# Altium PCB SiPM_Smart_Probe.PcbDoc
Units mm, origin at the board's own origin, x right, y up, seen from the top; angles counter-clockwise.
Board outline 35 x 46.5 mm, 2 copper layers (Top Layer, Bottom Layer); 15 components, 9 nets, 46 pads, 18 vias.
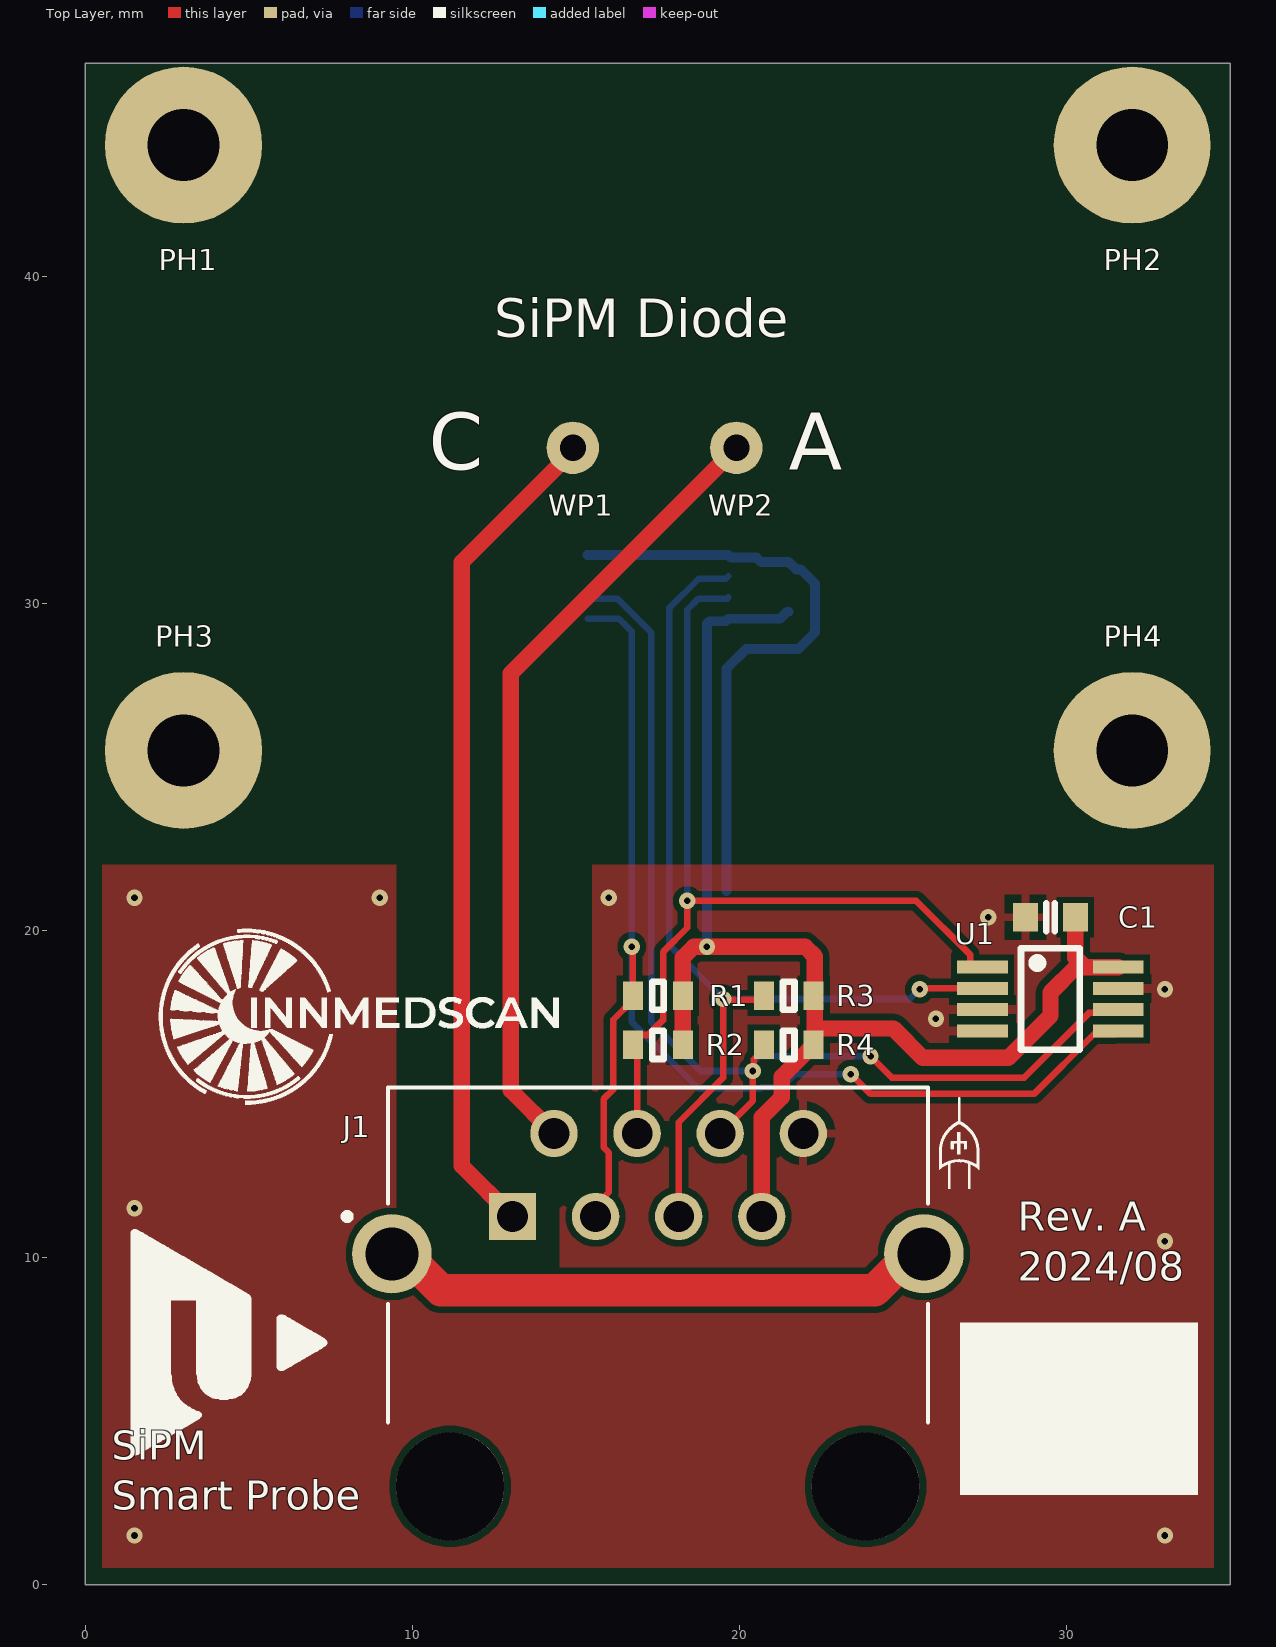
[diagram p0: Top Layer view]
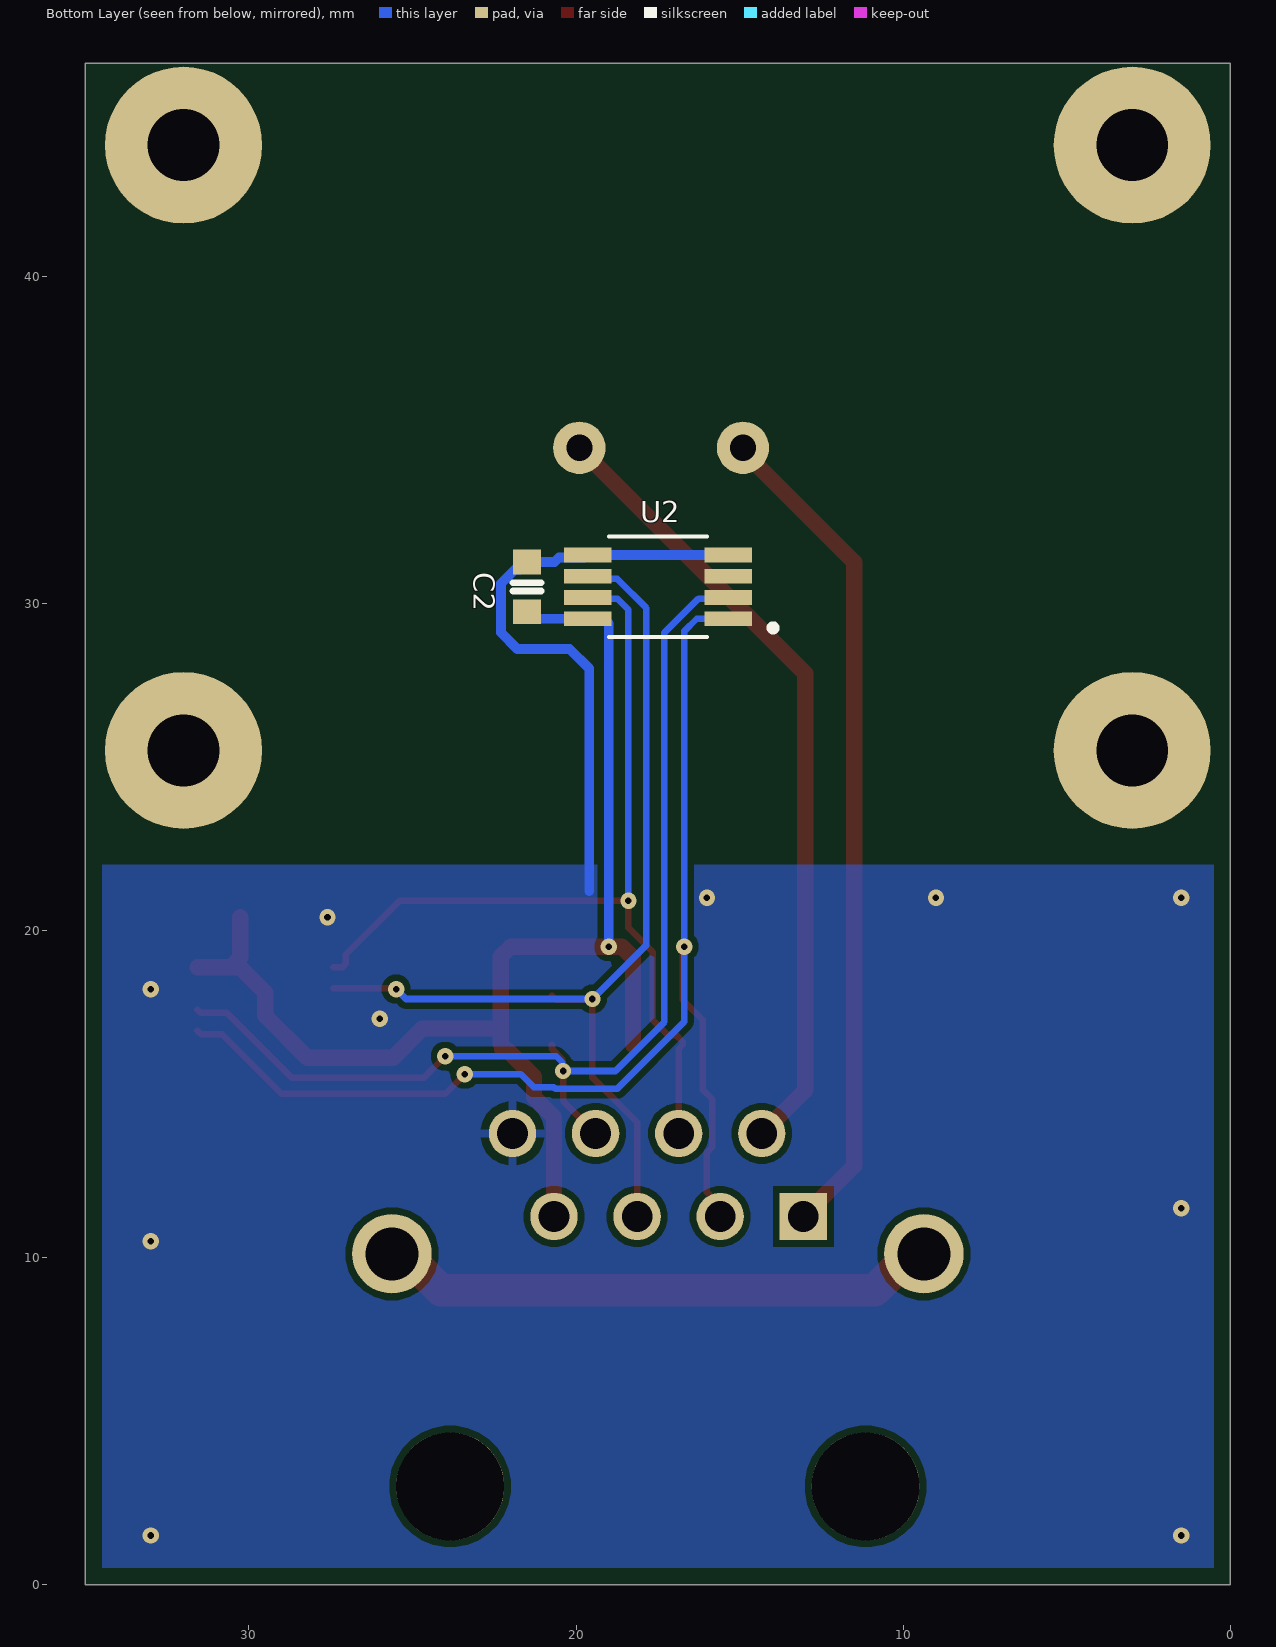
[diagram p1: Bottom Layer view, seen from below]

## Layer stack, top to bottom
Top Solder: solder mask 0.0102, Solder Resist, Dk 3.5
Top Layer: signal copper 0.0356
Dielectric 1: dielectric 0.32, FR-4, Dk 4.8
Bottom Layer: signal copper 0.0356
Bottom Solder: solder mask 0.0102, Solder Resist, Dk 3.5

## Board outline
0,0 0,46.5 35,46.5 35,0

## Design rules (kind name [scope] priority, off if disabled: settings)
BoardOutlineClearance [All] p1: gap=0.5 ignorepadtopadclearanceinfootprint=FALSE
Clearance Diff-to-polygon [InAnyDifferentialPair and (not IsVia) vs InPolygon and (OnLayer('Top Layer') OR OnLayer('Bottom Layer'))] p1: gap=0.8 ignorepadtopadclearanceinfootprint=FALSE
Clearance HV [InNetClass('HV') vs InPolygon] p2: gap=1 ignorepadtopadclearanceinfootprint=FALSE
Clearance Clearance_ALL [All] p3: gap=0.2 ignorepadtopadclearanceinfootprint=FALSE
ComponentClearance [All] p1: gap=0.1 collisioncheckmode=3 verticalgap=0.1 showdistances=FALSE
DiffPairsRouting [All] p1: maxlimit=0.2 minlimit=0.2 mostfreqgap=0.2 toplayer_minwidth=0.2 toplayer_maxwidth=0.2 toplayer_prefwidth=0.2 bottomlayer_minwidth=0.2 bottomlayer_maxwidth=0.2 bottomlayer_prefwidth=0.2 maxuncoupledlength=12.7
HoleSize [All] p1: absolutevalues=TRUE maxlimit=5 minlimit=0.025 maxpercent=80.000 minpercent=20.000
MinimumSolderMaskSliver [All] p1: minsoldermaskwidth=0.05
PolygonConnect [All] p1: thpad.connectstyle=Relief thpad.reliefconductorwidth=0.254 thpad.reliefentries=4 thpad.polygonreliefangle="90 Angle" thpad.airgapwidth=0.254 smdpad.connectstyle=Relief smdpad.reliefconductorwidth=0.254 smdpad.reliefentries=4 smdpad.polygonreliefangle="90 Angle" smdpad.airgapwidth=0.254 via.connectstyle=Direct via.reliefconductorwidth=0.254 via.reliefentries=4 via.polygonreliefangle="90 Angle" via.airgapwidth=0.254
RoutingVias [All] p1: holewidth=0.3 width=0.7 viastyle="Through Hole" minholewidth=0.2 minwidth=0.5 maxholewidth=0.5 maxwidth=1 useviatemplates=TRUE viatemplateguid#1={D885390B-54E5-40C9-AA4A-5F40DA9D8DF2} viatemplatename#1=v50h20m30
SilkToSilkClearance [All] p1: silktosilkclearance=0.1
SilkToSolderMaskClearance [IsPad] p1: minsilkscreentomaskgap=0.1 clearancetoexposedcopper=TRUE
SolderMaskExpansion [All] p1: expansion=0.102 istentingtop=FALSE
SupplyNets "Schematic Supply Nets_2" [InNet('GND')] p1: voltage=0.000
SupplyNets "Schematic Supply Nets_1" [InNet('GND-A')] p2: voltage=0.000
SupplyNets "Schematic Supply Nets" [InNet('+3V3')] p3: voltage=0.000
Width [All] p1: maxlimit=1 minlimit=0.2 preferedwidth=0.254
24 further rules are at their usual default settings.

## Components (designator, comment, footprint, x,y, rotation, side; value= is the part's Value field where it differs from the comment)
C1 "100nF/50V/X7R" sm_cap_0603 29.5,20.4 r0 top
C2 "100nF/50V/X7R" sm_cap_0603 21.5,30.5 r270 bottom
J1 "1-port, RJ-45, No LED" RJ45_1_PORT_NOLED 17.5,3 r0 top
PH1 "2.2 mm hole" c480h220#1 4,39 r0 top
PH2 "2.2 mm hole" c480h220#2 31,39 r0 top
PH3 "2.2 mm hole" c480h220#3 4,21 r0 top
PH4 "2.2 mm hole" c480h220#4 32,23 r0 top
R1 "10k/1%" sm_res_0603 17.5,18 r0 top
R2 "10k/1%" sm_res_0603 17.5,16.5 r0 top
R3 "10k/1%" sm_res_0603 21.5,18 r0 top
R4 "10k/1%" sm_res_0603 21.5,16.5 r0 top
U1 "24LC014H-I/MS" MSOP-8 29.5,17.9 r0 top
U2 "TMP275AIDGKR" VSSOP-8 17.5,30.5 r0 bottom
WP1 "Wirepad, 0.8 mm" Wirepad_0.8MM#1 13.4,35 r0 top
WP2 "Wirepad, 0.8 mm" Wirepad_0.8MM#2 20.4,35 r90 top

## Footprints (in the part's own frame and the unit in brackets; to place one, negate y for a bottom-side part, rotate by r counter-clockwise, add the part's x,y. Pads: shape width x height; smd on the part's side, far side on the other; paste and mask are expansions set on the pad)
c480h220#1 [mm]
  round 4.8 hole 2.2: 1(-1,5)
c480h220#2 [mm]
  round 4.8 hole 2.2: 1(1,5)
c480h220#3 [mm]
  round 4.8 hole 2.2: 1(-1,4.5)
c480h220#4 [mm]
  round 4.8 hole 2.2: 1(0,2.5)
MSOP-8 [mm]
  rect 1.55x0.4 smd mask+0.055: 1(-2.075,0.975) 2(-2.075,0.325) 3(-2.075,-0.325) 4(-2.075,-0.975) 5(2.075,-0.975) 6(2.075,-0.325) 7(2.075,0.325) 8(2.075,0.975)
  silkscreen extent -0.9,-1.55 0.9,1.55, body extent -1.66,-1.81 1.66,1.81, height 1
RJ45_1_PORT_NOLED [mm]
  rect 1.448x1.448 hole 0.94: 1(-4.445,8.25)
  round 1.448 hole 0.94: 2(-3.175,10.79) 3(-1.905,8.25) 4(-0.635,10.79) 5(0.635,8.25) 6(1.905,10.79) 7(3.175,8.25) 8(4.445,10.79)
  round 2.43 hole 1.62: SHIELD(-8.13,7.11) SHIELD(8.13,7.11)
  round 3.3 hole 3.3 unplated: ""(-6.35,0) ""(6.35,0)
  silkscreen extent -9.6,1.96 8.25,12.2, body extent -9.73,-5.52 9.93,12.14, height 14.33
sm_cap_0603 [mil]
  rect 30x34 smd: 1(-30,0) 2(30,0)
  silkscreen extent -5,-17 5,17, body extent -40,-16 40,16, height 15
sm_res_0603 [mil]
  rect 24x34 smd: 1(-30,0) 2(30,0)
  silkscreen extent -7,-17 7,17, body extent -31,-17 31,17, height 16
VSSOP-8 [mm] "Plastic Small Outline 5,05mm x 3,10mm"
  rect 1.45x0.45 smd mask+0.05: 1(-2.15,0.975) 2(-2.15,0.325) 3(-2.15,-0.325) 4(-2.15,-0.975) 5(2.15,-0.975) 6(2.15,-0.325) 7(2.15,0.325) 8(2.15,0.975)
  silkscreen extent -3.62,-1.54 1.5,1.54, body extent -2.45,-1.5 2.45,1.5, height 1.1
Wirepad_0.8MM#1 [mm]
  round 1.6 hole 0.8: 1(1.5,-0.25)
Wirepad_0.8MM#2 [mm]
  round 1.6 hole 0.8: 1(-0.25,0.5)

## Part data
C1 C2: library part Capacitor_0603_100n_50V_X7R, "MLCC capacitor, non-polarized", Manufacturer=Yageo, Package=0603, Part Number=CC0603KRX7R9BB104, Distributor=Mouser, Link=https://cz.mouser.com/ProductDetail/Yageo/CC0603KRX7R9BB104?qs=sGAEpiMZZMvsSlwiRhF8qgFnKIgZe697WZ9nrpNTeGg%3D
J1: library part RJ45_1_PORT_NOLED, Manufacturer=Amphenol, Package=RJ-45, Part Number=RJSBE5380C1, Distributor=Mouser, Link=https://cz.mouser.com/ProductDetail/Amphenol-Commercial-Products/RJSBE5380C1?qs=LiXFYW4OVo%2FdVDofBGy8HQ%3D%3D
PH1 PH2 PH3 PH4: library part PLATED_HOLE2.2_PAD4.8
R1 R2 R3 R4: library part Resistor_0603_10k_1%, "Chip resistor", Manufacturer=Yageo, Package=0603, Part Number=RC0603FR-0710KL, Distributor=Mouser, Link=https://cz.mouser.com/ProductDetail/Yageo/RC0603FR-0710KL?qs=sGAEpiMZZMtlubZbdhIBIAhzU1Tw%252BHVakiDuQ4Zki0U%3D
U1: "I2C EEPROM 1K 128x8", Manufacturer="Microchip Technology", Package=MSOP-8, Distributor=Mouser, Link=https://cz.mouser.com/ProductDetail/Microchip-Technology/24LC014H-I-MS?qs=hH%252BOa0VZEiBOWodxna96qw%3D%3D, Part Number=24LC014H-I/MS
U2: library part TMP275, "I2C ±0.5°C Temperature Sensor", Manufacturer="Texas Instruments", Package=VSSOP-8, Distributor=Mouser, Link=https://cz.mouser.com/ProductDetail/Texas-Instruments/TMP275AIDGKR?qs=RnzODY3cU8v9LWMH5YW1eQ%3D%3D&utm_id=20109199427&gad_source=1&gclid=CjwKCAjwhIS0BhBqEiwADAUhc0_SASKqB-PLyWTqpads6ibLibyqbTwsBhDKT4CGQp2hdobwB620EhoCWvAQAvD_BwE, Part Number=TMP275AIDGKR
WP1 WP2: library part Wirepad_0.8MM

## Via types
v1: diameter 0.5, hole 0.2, Top Layer to Bottom Layer, 18 vias

## Nets (pads, with @x,y where several pads share a name; then routed paths per layer and width w, separated by ;. In a path a pad name is that pad's centre, name@x,y a point inside that pad or via, vN(x,y) a via of type N, cw(c..) or ccw(c..) an arc to the next point about the centre after c; other vN are vias at no path point)
+3V3: C1.2 C2.2 J1.7 R1.2 R2.2 R3.2 R4.2 U1.8 U2.8 | length 41.1
  Top Layer w0.5: R2.2 18.262,19.162 18.6,19.5 22,19.5 22.3,19.2 22.3,17.033 ; J1.7 20.675,14.282 21.288,14.895 21.288,15.526 22.08,16.318 22.207,16.318 22.262,16.373 R4.2 22.3,16.538 22.3,17.033 ; C1.2 30.262,19.168 30.555,18.875 ; U1.8 30.555,18.875 ; 22.3,17.033 22.333,17 24.7,17 25.6,16.1 28.211,16.1 29.5,17.389 29.5,18.1 30.275,18.875 30.555,18.875
  Bottom Layer w0.3: v1(19,19.5) 19,29.375 19.075,29.45 19.575,29.45 U2.8 21.236,29.525 21.449,29.738 C2.2
ADD0: J1.4 R2.1 U1.1 U2.7 | length 28.3
  Top Layer w0.2: J1.4 16.865,16.373 R2.1 16.738,16.595 16.943,16.799 17.199,16.799 17.657,17.257 17.657,19.335 18.4,20.078 v1(18.4,20.9) 25.4,20.9 27.042,19.258 27.042,18.975 27.142,18.875 U1.1
  Bottom Layer w0.2: v1(18.4,20.9) 18.4,29.8 18.742,30.142 19.617,30.142 U2.7
ADD1: J1.5 R3.1 U1.2 U2.6 | length 31.3
  Top Layer w0.2: J1.5 18.135,14.135 19.5,15.5 19.5,17.783 19.59,17.873 20.611,17.873 R3.1 ; v1(25.5,18.2) 25.525,18.225 U1.2
  Bottom Layer w0.2: U2.6 19.575,30.75 18.75,30.75 17.85,29.85 17.85,19.55 v1(19.5,17.9) 25.2,17.9 v1(25.5,18.2)
GND: C1.1 C2.1 J1.8 U1.3 U1.4 U1.7 U2.4 U2.5 | length 18.8
  Bottom Layer w0.3: U2.4 U2.5 19.725,31.4 20.52,31.4 20.658,31.262 C2.1 21.731,31.031 21.869,31.031 22.3,30.6 22.3,29.1 21.8,28.6 20.2,28.6 19.6,28 19.6,21.2
  other v1: 1.5,1.5 33,1.5 33,10.5 1.5,11.5 26,17.3 33,18.2 27.6,20.4 1.5,21 9,21 16,21
GND-A: J1.SHIELD | length 17.2
  Top Layer w1: J1.SHIELD@9.37,10.11 9.757,10.11 10.867,9 24.133,9 25.243,10.11 J1.SHIELD@25.63,10.11
I2C_SCL: J1.6 R4.1 U1.6 U2.2 | length 33.6
  Top Layer w0.2: J1.6 20.4,14.785 v1(20.4,15.7) 20.427,15.727 20.427,16.062 20.738,16.373 R4.1 ; v1(24,16.15) 24.65,15.5 28.7,15.5 30.675,17.475 31.475,17.475 U1.6
  Bottom Layer w0.2: U2.2 15.383,30.142 16.258,30.142 17.3,29.1 17.3,17.2 18.8,15.7 v1(20.4,15.7) ; 20.427,15.967 20.61,16.15 v1(24,16.15)
I2C_SDA: J1.3 R1.1 U1.5 U2.1 | length 39.3
  Top Layer w0.2: J1.3 15.595,11.586 16,11.991 16,13.207 15.841,13.366 15.841,14.841 16.133,15.133 16.133,17.268 16.738,17.873 R1.1 16.738,19.462 v1(16.7,19.5) ; v1(23.4,15.6) 24,15 29,15 30.825,16.825 31.475,16.825 U1.5
  Bottom Layer w0.2: U2.1 16.309,29.525 16.7,29.134 v1(16.7,19.5) 16.7,17.2 18.75,15.15 20.628,15.15 20.678,15.2 21.288,15.2 21.688,15.6 v1(23.4,15.6)
NetJ1_1: J1.1 WP1.1 | length 25.6
  Top Layer w0.5: J1.1 11.5,12.805 11.5,31.25 WP1.1@15,34.75
NetJ1_2: J1.2 WP2.1 | length 24.4
  Top Layer w0.5: J1.2 13,15.115 13,27.85 WP2.1
pads on no net: J1. PH1.1 PH2.1 PH3.1 PH4.1 U2.3

## Polygon pours and split planes (outlines as drawn)
GND on Bottom Layer "NONET_L-01_P-001" (solid, pour order 1): 0,0 35,0 35,22 0,22
GND on Top Layer "NONET_L-01_P-001" (solid, pour order 0): 0,0 35,0 35,22 0,22
no net on Top Overlay "NONET_L-01_P-001" (solid): 26.75,8 34,8 34,2.75 26.75,2.75

## Other copper
Top Layer:
  pour cut-out: 9.5,22 9.5,11.5 11.5,9.5 14.5,9.5 14.5,11.5 15.5,12.5 15.5,22

## Silkscreen, mask and mechanical layers (free items; w line width, h text height)
Top Overlay:
  drawing of 493 lines, arcs and shapes, not listed
  text "SiPM Diode" at 12.5,37.75 h2
  text "C" at 10.5,33.5 h3
  text "A" at 21.5,33.5 h3
  text "Rev. A / 2024/08" at 28.5,9 h1.52
  text "SiPM / Smart Probe" at 0.8,2 h1.52
Mechanical 1:
  the board outline again, w0.15

## Text inside footprints (layer, text, board x,y; h text height)
J1: Mechanical 13 "PCB EDGE" at 13.7,0.6 h1.02